# EAGLE board Wordclock-back2 (EAGLE 6.0)
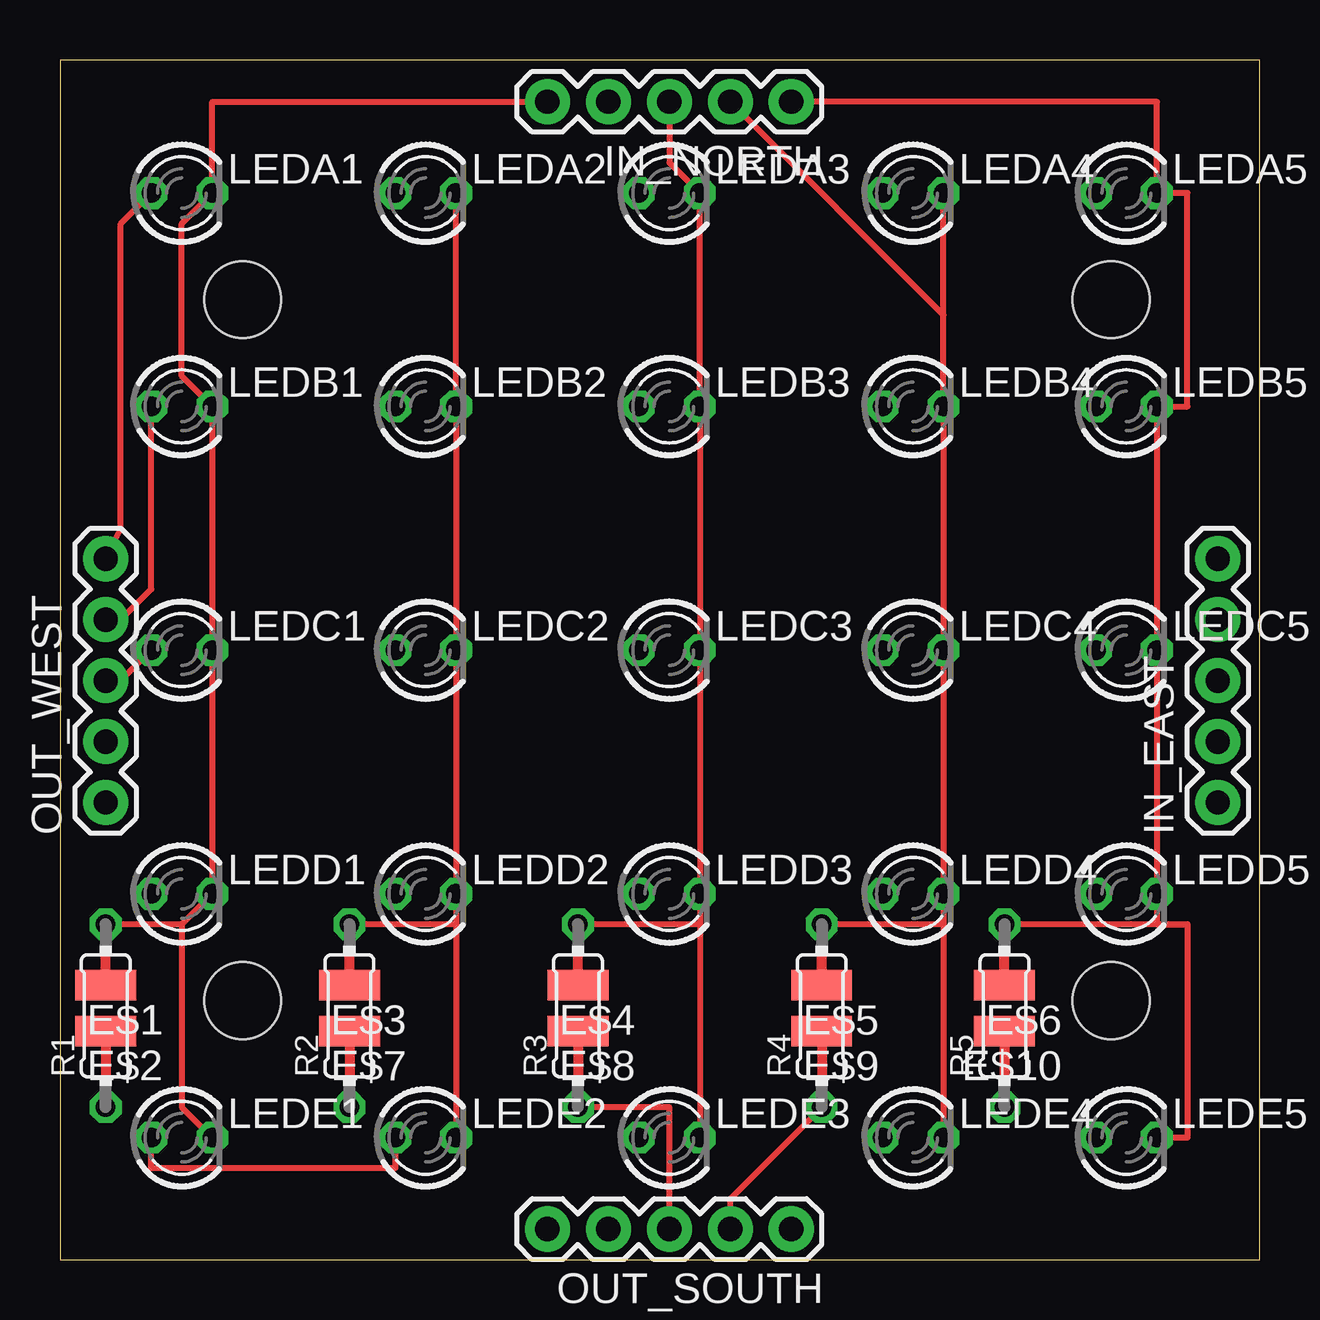
[diagram p0: board, top side]
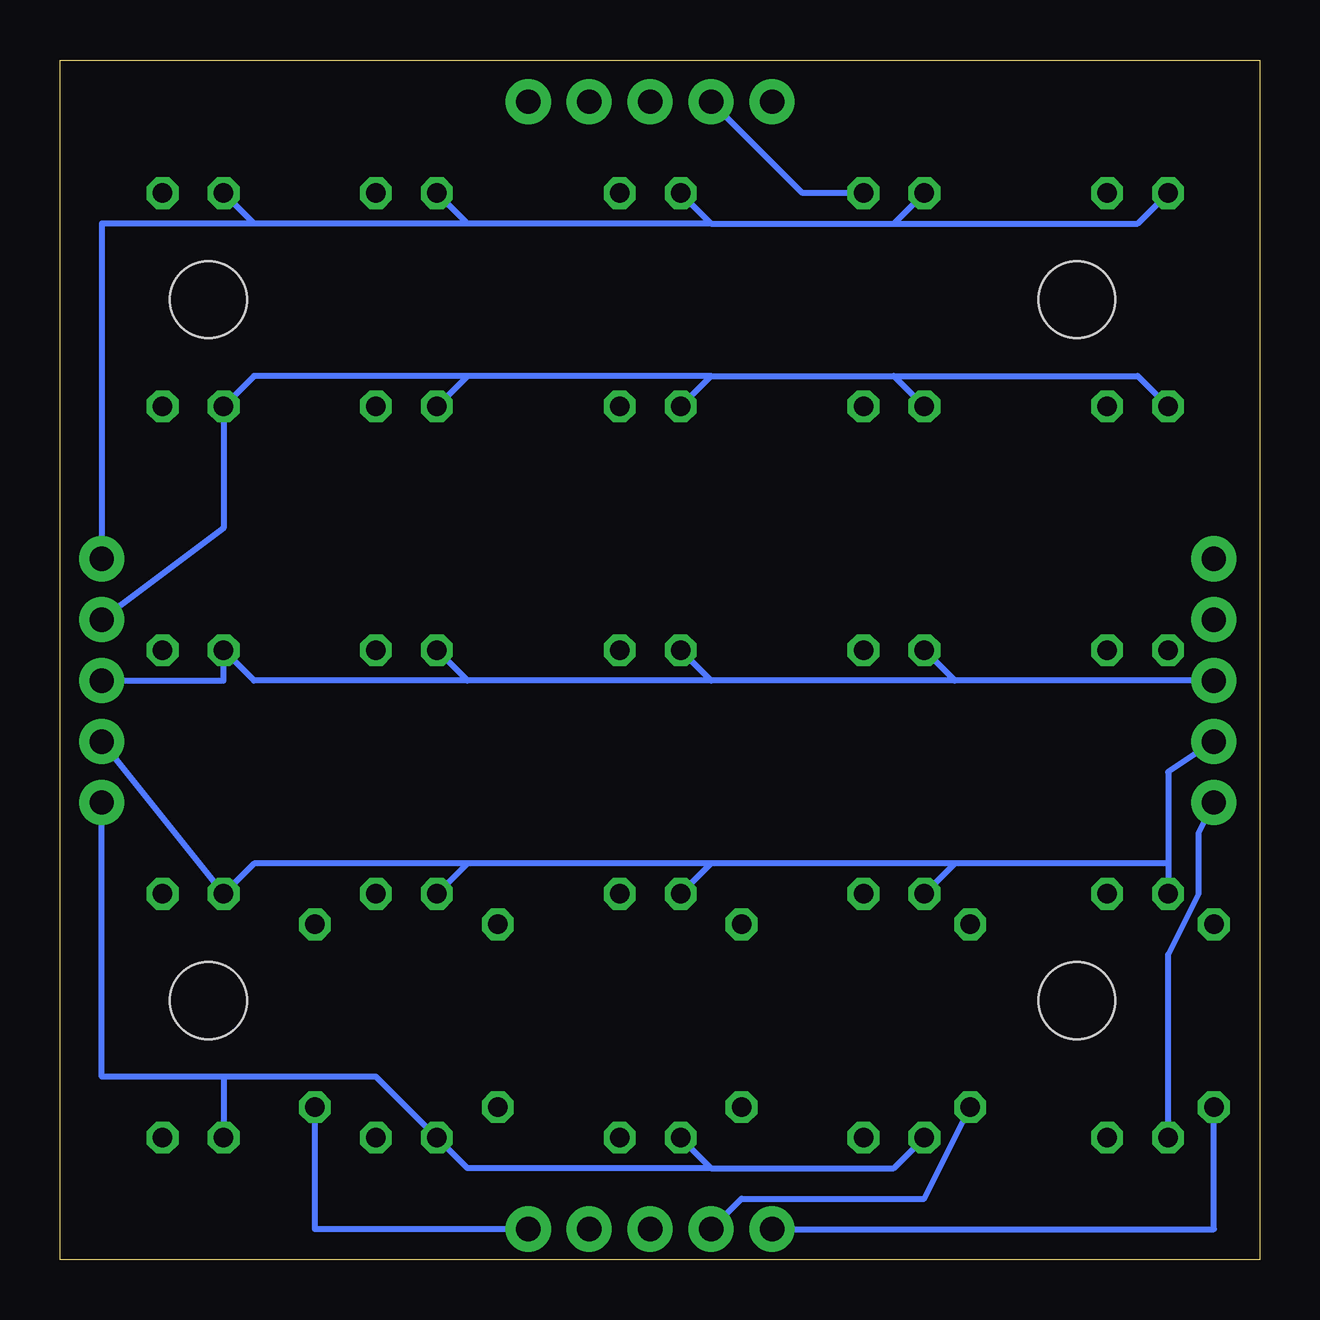
[diagram p1: board, bottom side, seen from below]

Size 50 x 50 mm. Coordinates in mm from the lower left corner, seen from the top.
Outline: 0,0 50,0 50,50 0,50 0,0
Copper layers (1*16): Top 0.035mm / dielectric 1.5mm / Bottom 0.035mm
Design rules: minimum track width 6mil, minimum drill 12mil, track to track 6mil, track to pad 6mil, pad to pad 6mil, via to via 6mil, smd to smd 0mil, copper to edge 10mil, drill to drill 10mil, minimum pad ring 10mil, minimum via ring 6mil, stop-mask expansion 2mil, vias tented up to drill 100mil, thermal gap 10mil
Holes 3.2 mm at 43.81,10.79 7.62,10.79 43.81,40.01 7.62,40.01

## Footprints (pad centres in the part's own frame; a part is rotated, then mirrored left to right if it is on the bottom)
SMD1,27-2,54 = smd 1.27 x 2.54: 1 0,0
1X05 = drill 1.016 pad 1.88: 1 0,0; 2 2.54,0; 3 5.08,0; 4 7.62,0; 5 10.16,0
LED3MM = drill 0.813 octagon: A -1.27,0; K 1.27,0
0204/7 = drill 0.813 octagon: 1 -3.81,0; 2 3.81,0

## Placement (x,y rotation side)
E$1  [SMD1,27-2,54]  1.91,11.43 90 top
E$2  [SMD1,27-2,54]  1.91,9.53 90 top
E$3  [SMD1,27-2,54]  12.06,11.43 90 top
E$4  [SMD1,27-2,54]  21.59,11.43 90 top
E$5  [SMD1,27-2,54]  31.75,11.43 90 top
E$6  [SMD1,27-2,54]  39.37,11.43 90 top
E$7  [SMD1,27-2,54]  12.06,9.53 90 top
E$8  [SMD1,27-2,54]  21.59,9.53 90 top
E$9  [SMD1,27-2,54]  31.75,9.53 90 top
E$10  [SMD1,27-2,54]  39.37,9.53 90 top
IN_EAST  [1X05]  48.26,19.05 90 top
IN_NORTH  [1X05]  30.48,48.26 180 top
LEDA1  [LED3MM]  5.08,44.45 0 top
LEDA2  [LED3MM]  15.24,44.45 0 top
LEDA3  [LED3MM]  25.4,44.45 0 top
LEDA4  [LED3MM]  35.56,44.45 0 top
LEDA5  [LED3MM]  44.45,44.45 0 top
LEDB1  [LED3MM]  5.08,35.56 0 top
LEDB2  [LED3MM]  15.24,35.56 0 top
LEDB3  [LED3MM]  25.4,35.56 0 top
LEDB4  [LED3MM]  35.56,35.56 0 top
LEDB5  [LED3MM]  44.45,35.56 0 top
LEDC1  [LED3MM]  5.08,25.4 0 top
LEDC2  [LED3MM]  15.24,25.4 0 top
LEDC3  [LED3MM]  25.4,25.4 0 top
LEDC4  [LED3MM]  35.56,25.4 0 top
LEDC5  [LED3MM]  44.45,25.4 0 top
LEDD1  [LED3MM]  5.08,15.24 0 top
LEDD2  [LED3MM]  15.24,15.24 0 top
LEDD3  [LED3MM]  25.4,15.24 0 top
LEDD4  [LED3MM]  35.56,15.24 0 top
LEDD5  [LED3MM]  44.45,15.24 0 top
LEDE1  [LED3MM]  5.08,5.08 0 top
LEDE2  [LED3MM]  15.24,5.08 0 top
LEDE3  [LED3MM]  25.4,5.08 0 top
LEDE4  [LED3MM]  35.56,5.08 0 top
LEDE5  [LED3MM]  44.45,5.08 0 top
OUT_SOUTH  [1X05]  30.48,1.27 180 top
OUT_WEST  [1X05]  1.91,19.05 90 top
R1  [0204/7]  1.91,10.16 90 top
R2  [0204/7]  12.06,10.16 90 top
R3  [0204/7]  21.59,10.16 90 top
R4  [0204/7]  31.75,10.16 90 top
R5  [0204/7]  39.37,10.16 90 top

## Library data of the parts
E$1-E$10 = wirepad
IN_EAST IN_NORTH OUT_SOUTH OUT_WEST = SparkFun
LEDA1-LEDA5 LEDB1-LEDB5 LEDC1-LEDC5 LEDD1-LEDD5 LEDE1-LEDE5 = led
R1-R5 = resistor

## Nets
N$1: E$1.1 IN_NORTH.5 LEDA1.K LEDB1.K LEDC1.K LEDD1.K LEDE1.K R1.2
N$2: E$3.1 IN_NORTH.4 LEDA2.K LEDB2.K LEDC2.K LEDD2.K LEDE2.K R2.2
N$3: E$4.1 IN_NORTH.3 LEDA3.K LEDB3.K LEDC3.K LEDD3.K LEDE3.K R3.2
N$4: E$5.1 IN_NORTH.2 LEDA4.K LEDB4.K LEDC4.K LEDD4.K LEDE4.K R4.2
N$5: E$6.1 IN_NORTH.1 LEDA5.K LEDB5.K LEDC5.K LEDD5.K LEDE5.K R5.2
N$6: E$10.1 OUT_SOUTH.1 R5.1
N$12: E$9.1 OUT_SOUTH.2 R4.1
N$13: E$8.1 OUT_SOUTH.3 R3.1
N$14: E$7.1 OUT_SOUTH.4 R2.1
N$15: E$2.1 OUT_SOUTH.5 R1.1
N$16: IN_EAST.5 LEDA1.A LEDA2.A LEDA3.A LEDA4.A LEDA5.A OUT_WEST.5
N$17: IN_EAST.4 LEDB1.A LEDB2.A LEDB3.A LEDB4.A LEDB5.A OUT_WEST.4
N$18: IN_EAST.3 LEDC1.A LEDC2.A LEDC3.A LEDC4.A LEDC5.A OUT_WEST.3
N$19: IN_EAST.2 LEDD1.A LEDD2.A LEDD3.A LEDD4.A LEDD5.A OUT_WEST.2
N$20: IN_EAST.1 LEDE1.A LEDE2.A LEDE3.A LEDE4.A LEDE5.A OUT_WEST.1

## Tracks (layer width: path | path; a pad name or v marks a point on that pad's centre or on a via)
N$1
  Top 0.254: 5.08,13.97 5.08,6.35 LEDE1.K | IN_NORTH.5 6.35,48.26 LEDA1.K 5.08,43.18 5.08,36.83 LEDB1.K LEDC1.K LEDD1.K 5.08,13.97 | 5.08,13.97 R1.2
  Top 0.406: E$1.1 R1.2
N$2
  Top 0.254: 16.51,13.97 LEDD2.K LEDC2.K LEDB2.K LEDA2.K | 16.51,13.97 LEDE2.K | 16.51,13.97 R2.2
  Top 0.406: E$3.1 R2.2
  Bottom 0.254: IN_NORTH.4 19.05,44.45 LEDA2.K
N$3
  Top 0.254: 26.67,13.97 LEDD3.K LEDC3.K LEDB3.K LEDA3.K 25.4,45.72 IN_NORTH.3 | 26.67,13.97 LEDE3.K | 26.67,13.97 R3.2
  Top 0.406: E$4.1 R3.2
N$4
  Top 0.254: 36.83,13.97 LEDD4.K LEDC4.K LEDB4.K 36.83,39.37 | 36.83,13.97 LEDE4.K | 36.83,13.97 R4.2 | 36.83,39.37 LEDA4.K | 36.83,39.37 IN_NORTH.2
  Top 0.406: E$5.1 R4.2
N$5
  Top 0.254: 46.99,13.97 45.72,13.97 LEDD5.K LEDC5.K LEDB5.K 46.99,35.56 46.99,44.45 LEDA5.K 45.72,48.26 IN_NORTH.1 | 46.99,13.97 46.99,5.08 LEDE5.K | 46.99,13.97 R5.2
  Top 0.406: E$6.1 R5.2
N$6
  Top 0.406: E$10.1 R5.1
  Bottom 0.254: R5.1 39.37,1.27 OUT_SOUTH.1
N$12
  Top 0.254: R4.1 27.94,2.54 OUT_SOUTH.2
  Top 0.406: E$9.1 R4.1
N$13
  Top 0.254: R3.1 25.4,6.35 OUT_SOUTH.3
  Top 0.406: E$8.1 R3.1
N$14
  Top 0.406: E$7.1 R2.1
  Bottom 0.254: R2.1 13.97,2.54 21.59,2.54 OUT_SOUTH.4
N$15
  Top 0.406: E$2.1 R1.1
  Bottom 0.254: R1.1 1.91,1.27 OUT_SOUTH.5
N$16
  Top 0.254: LEDA1.A 2.54,43.18 2.54,30.48 OUT_WEST.5
  Bottom 0.254: 15.24,43.18 LEDA2.A | 22.86,43.18 15.24,43.18 | LEDA3.A 22.86,43.18 | 33.02,43.18 LEDA4.A | 22.86,43.18 33.02,43.18 | 41.91,43.18 LEDA5.A | 33.02,43.18 41.91,43.18 | IN_EAST.5 48.26,43.18 41.91,43.18 | LEDA1.A 5.08,43.18 15.24,43.18
N$17
  Top 0.254: LEDB1.A 3.81,27.94 2.54,26.67 OUT_WEST.4
  Bottom 0.254: 15.24,36.83 LEDB2.A | 22.86,36.83 15.24,36.83 | LEDB3.A 22.86,36.83 | 33.02,36.83 LEDB4.A | 22.86,36.83 33.02,36.83 | 33.02,36.83 41.91,36.83 LEDB5.A 43.18,30.48 IN_EAST.4 | LEDB1.A 5.08,36.83 15.24,36.83
N$18
  Top 0.254: LEDC1.A 2.54,24.13 OUT_WEST.3
  Bottom 0.254: IN_EAST.3 43.18,24.13 LEDC5.A 41.91,24.13 33.02,24.13 | 12.7,24.13 LEDC2.A | OUT_WEST.3 12.7,24.13 | 22.86,24.13 LEDC3.A | 12.7,24.13 22.86,24.13 | 33.02,24.13 LEDC4.A | 22.86,24.13 33.02,24.13
N$19
  Bottom 0.254: IN_EAST.2 LEDD5.A 41.91,16.51 33.02,16.51 | 3.81,16.51 3.81,20.32 OUT_WEST.2 | 3.81,16.51 LEDD1.A | 12.7,16.51 LEDD2.A | 3.81,16.51 12.7,16.51 | 22.86,16.51 LEDD3.A | 12.7,16.51 22.86,16.51 | 33.02,16.51 LEDD4.A | 22.86,16.51 33.02,16.51
N$20
  Top 0.254: LEDE1.A 3.81,3.81 13.97,3.81 LEDE2.A
  Bottom 0.254: LEDE2.A 15.24,3.81 22.86,3.81 | LEDE3.A 22.86,3.81 | 22.86,3.81 33.02,3.81 LEDE4.A 36.83,7.62 43.18,7.62 | 43.18,7.62 LEDE5.A | IN_EAST.1 48.26,7.62 43.18,7.62 | LEDE1.A 3.81,12.7 2.54,15.24 2.54,17.78 OUT_WEST.1

## Text on the board
Name: - | - | A1 | 1 | 5 | A5 | Order #41189 | A | + | Wordclock v1.0 | A | + | Dec2011 | C1 | C3 | C5 | http://kalshagar.wikispaces.com/WordClock | E | + | E | + | E1 | E5 | 1 | 5 | - | -